# EAGLE board numpad (EAGLE 9.6.2)
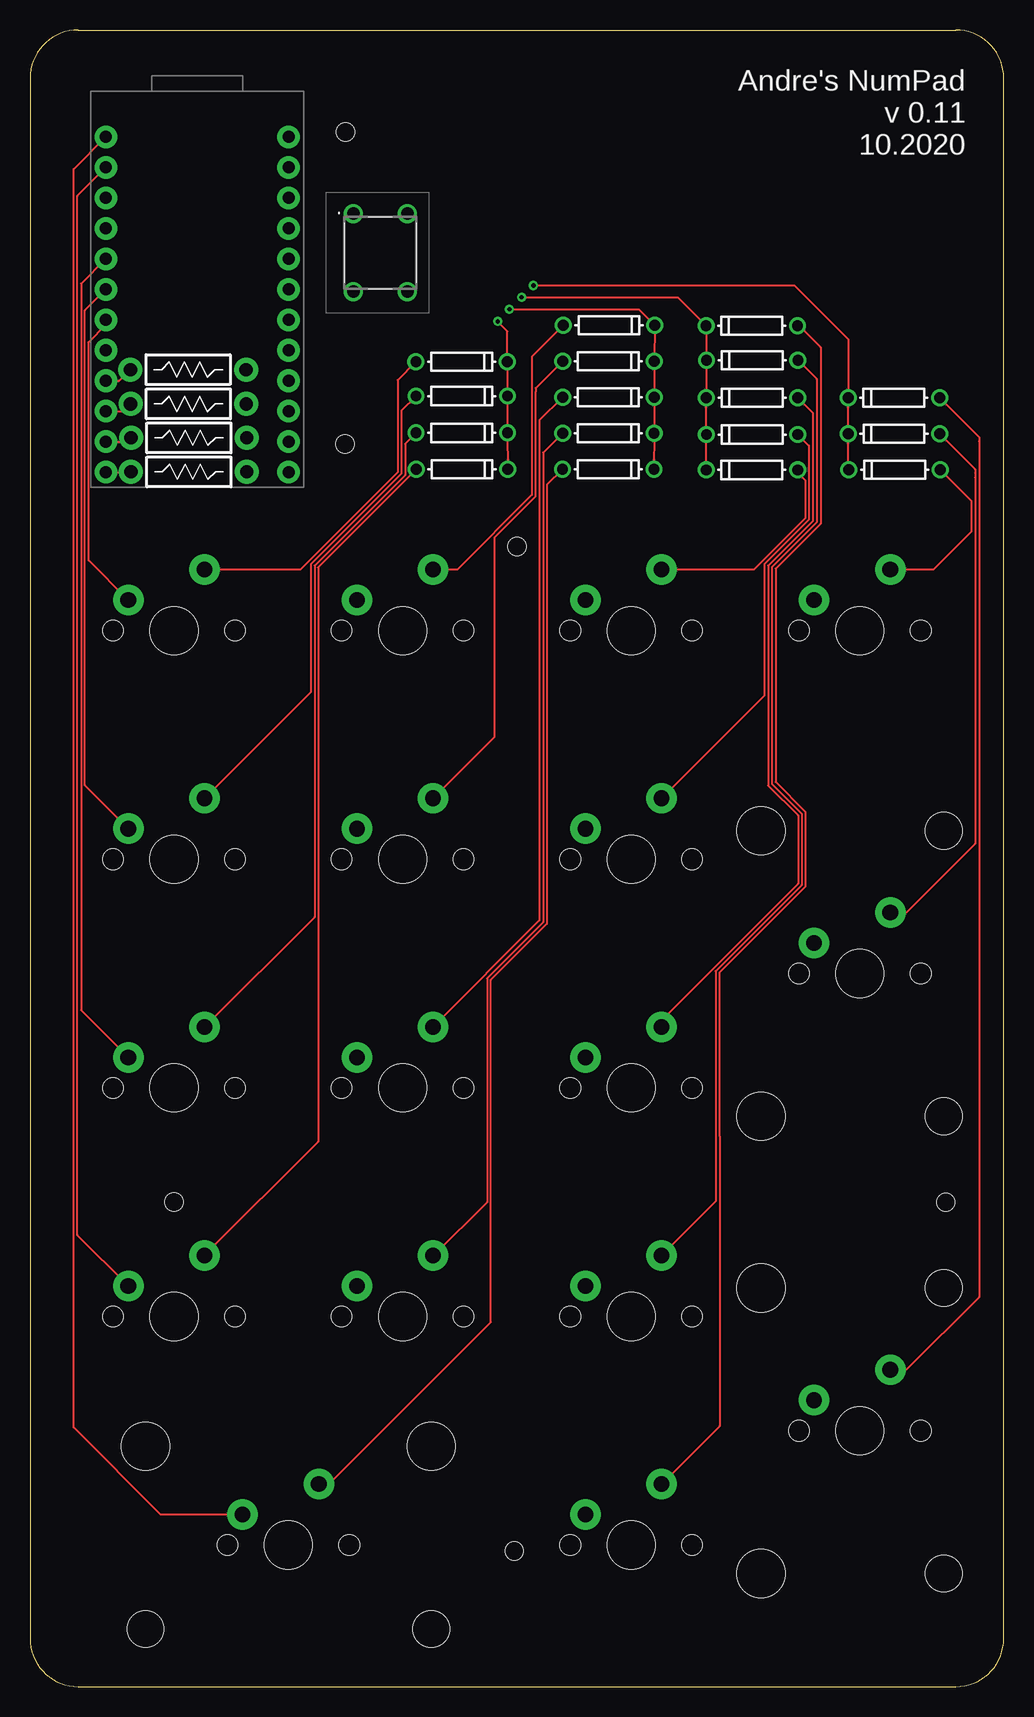
[diagram p0: board, top side]
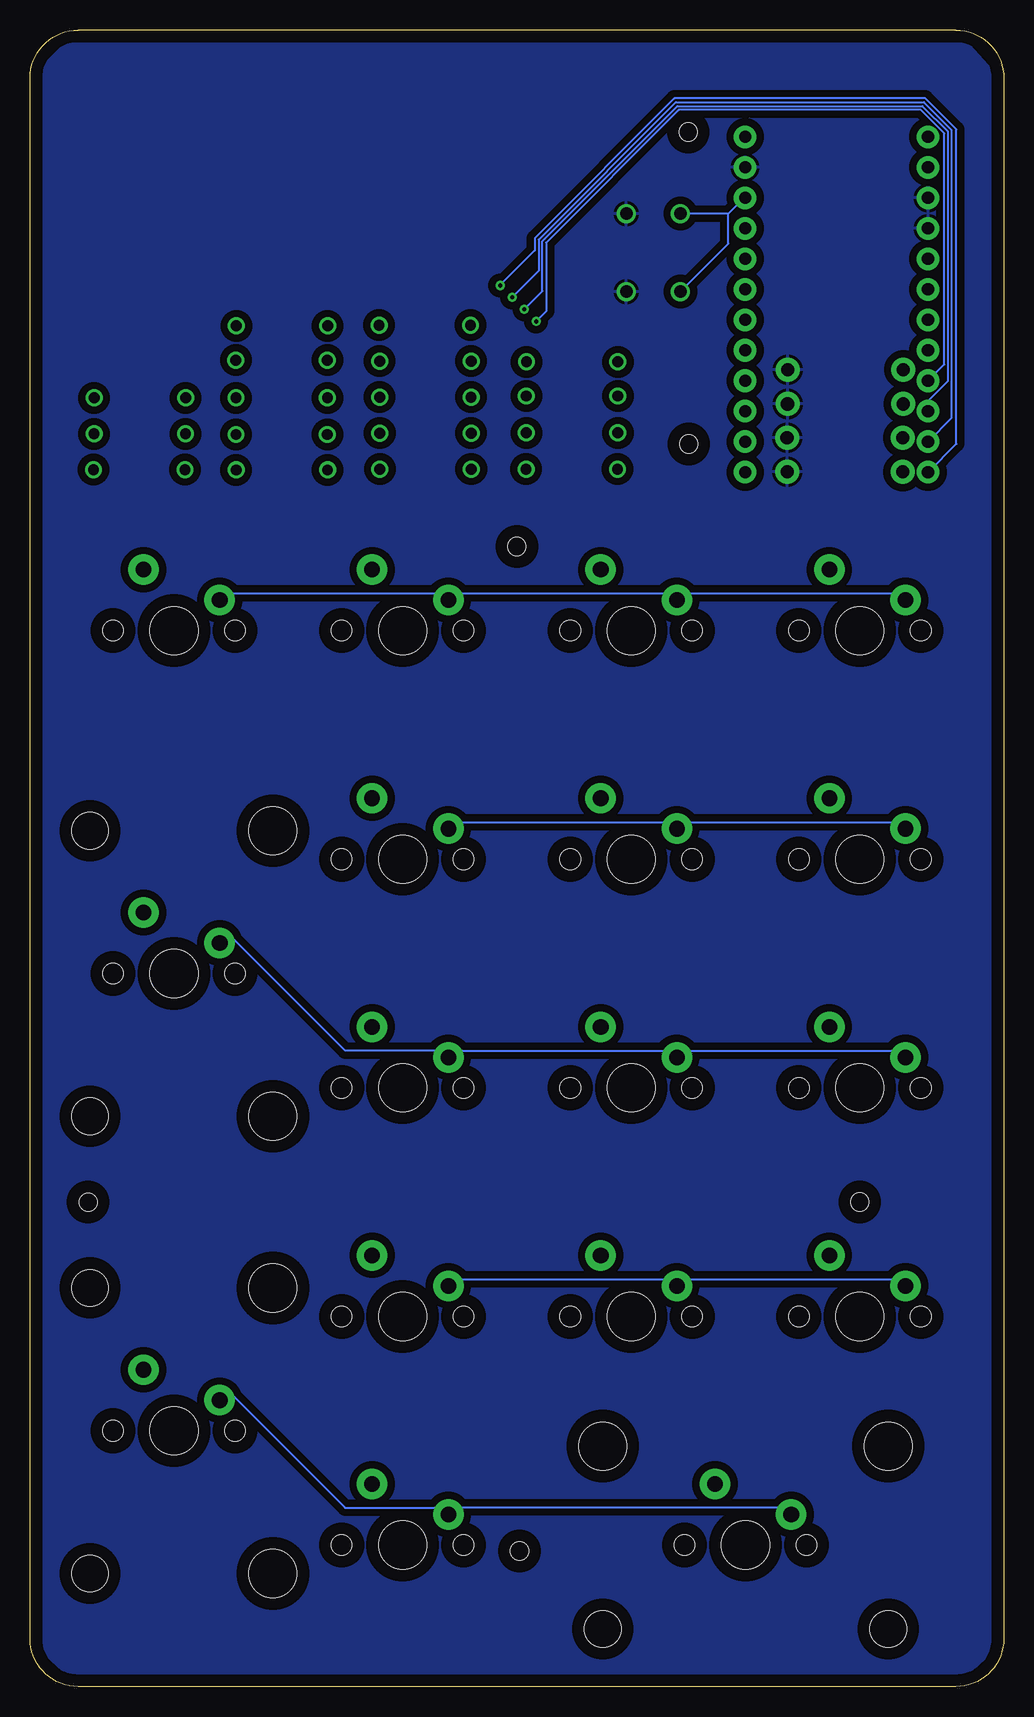
[diagram p1: board, bottom side, seen from below]

Size 81.15 x 138.05 mm. Coordinates in mm from the lower left corner, seen from the top.
Outline: 0,134.05 0,4 arc90 4,0 77.15,0 arc90 81.15,4 81.15,134.05 arc90 77.15,138.05 4,138.05 arc90 0,134.05
Copper layers (1*16): Top 0.035mm / dielectric 1.5mm / Bottom 0.035mm
Design rules "default": minimum track width 6mil, minimum drill 0.35mm, track to track 6mil, track to pad 6mil, pad to pad 6mil, via to via 6mil, smd to smd 6mil, copper to edge 40mil, drill to drill 6mil, minimum pad ring 10mil, minimum via ring 8mil, stop-mask expansion 4mil, vias tented up to drill 0mil, thermal gap 10mil
Holes 1.5 mm at 40.58,95.01 26.25,103.55 26.29,129.56 76.3,40.38 12,40.38 40.36,11.3

## Footprints (pad centres in the part's own frame; a part is rotated, then mirrored left to right if it is on the bottom)
MX-2U-FLIPPED = drill 1.3 pad 2.54: MX1 -3.81,2.54; MX2 2.54,5.08 | hole 4: 0,0; -11.9,8.24; 11.9,8.24 | hole 1.7: -5.08,0; 5.08,0 | hole 3.05: -11.9,-7; 11.9,-7
MX-1U = drill 1.3 pad 2.54: MX1 -3.81,2.54; MX2 2.54,5.08 | hole 4: 0,0 | hole 1.7: -5.08,0; 5.08,0
SPARKFUN_PRO_MICRO = drill 1.016 pad 1.88: 1 -7.62,12.7; 2 -7.62,10.16; 3 -7.62,7.62; 4 -7.62,5.08; 5 -7.62,2.54; 6 -7.62,0; 7 -7.62,-2.54; 8 -7.62,-5.08; 9 -7.62,-7.62; 10 -7.62,-10.16; 11 -7.62,-12.7; 12 -7.62,-15.24; 13 7.62,-15.24; 14 7.62,-12.7; 15 7.62,-10.16; 16 7.62,-7.62; 17 7.62,-5.08; 18 7.62,-2.54; 19 7.62,0; 20 7.62,2.54; 21 7.62,5.08; 22 7.62,7.62; 23 7.62,10.16; 24 7.62,12.7
DO-1N4148 = drill 0.9: A -3.81,0; C 3.81,0
MX-2U-ROTATED = drill 1.3 pad 2.54: MX1 -3.81,2.54; MX2 2.54,5.08 | hole 4: 0,0; -8.24,-11.9; -8.24,11.9 | hole 1.7: -5.08,0; 5.08,0 | hole 3.05: 7,-11.9; 7,11.9
THT-RESISTOR = drill 1.1 pad 2: 1 -4.82,0; 2 4.82,0
TL1105AF160Q = drill 1.05 pad 1.575: 1 0,0; 2 0,-6.5; 3 4.5,0; 4 4.5,-6.5

## Placement (x,y rotation side)
0  KEYSWITCH-PLAIN-MX-2U-FLIPPED  [MX-2U-FLIPPED]  21.52,11.8 0 top
1  KEYSWITCH-PLAIN-MX-1U  [MX-1U]  12,30.85 0 top
2  KEYSWITCH-PLAIN-MX-1U  [MX-1U]  31.05,30.85 0 top
3  KEYSWITCH-PLAIN-MX-1U  [MX-1U]  50.1,30.85 0 top
4  KEYSWITCH-PLAIN-MX-1U  [MX-1U]  12,49.9 0 top
5  KEYSWITCH-PLAIN-MX-1U  [MX-1U]  31.05,49.9 0 top
6  KEYSWITCH-PLAIN-MX-1U  [MX-1U]  50.1,49.9 0 top
7  KEYSWITCH-PLAIN-MX-1U  [MX-1U]  12,68.95 0 top
8  KEYSWITCH-PLAIN-MX-1U  [MX-1U]  31.05,68.95 0 top
9  KEYSWITCH-PLAIN-MX-1U  [MX-1U]  50.1,68.95 0 top
B1  SPARKFUN_PRO_MICRO  [SPARKFUN_PRO_MICRO]  13.94,116.45 0 top
D2  [DO-1N4148]  35.98,107.55 0 top
D3  [DO-1N4148]  35.98,104.48 0 top
D4  [DO-1N4148]  36,101.45 0 top
D5  [DO-1N4148]  48.19,104.45 0 top
D6  [DO-1N4148]  48.19,101.45 0 top
D7  [DO-1N4148]  48.21,107.45 0 top
D8  [DO-1N4148]  48.2,110.45 0 top
D9  [DO-1N4148]  48.25,113.45 0 top
D10  [DO-1N4148]  60.16,101.39 180 top
D11  [DO-1N4148]  72.05,101.41 180 top
D12  [DO-1N4148]  72,104.4 180 top
D13  [DO-1N4148]  71.99,107.4 180 top
D14  [DO-1N4148]  60.18,110.53 180 top
D15  [DO-1N4148]  60.15,113.4 180 top
D16  [DO-1N4148]  60.18,104.34 180 top
D17  [DO-1N4148]  60.17,107.4 180 top
D18  [DO-1N4148]  35.97,110.4 0 top
ENTER  KEYSWITCH-PLAIN-MX-2U-ROTATED  [MX-2U-ROTATED]  69.15,21.33 0 top
MINUS  KEYSWITCH-PLAIN-MX-1U  [MX-1U]  69.15,88 0 top
NUM  KEYSWITCH-PLAIN-MX-1U  [MX-1U]  12,88 0 top
PERIOD  KEYSWITCH-PLAIN-MX-1U  [MX-1U]  50.1,11.8 0 top
PLUS  KEYSWITCH-PLAIN-MX-2U-ROTATED  [MX-2U-ROTATED]  69.15,59.43 0 top
R1  20k  [THT-RESISTOR]  13.19,109.75 0 top
R2  20k  [THT-RESISTOR]  13.24,101.23 0 top
R3  20k  [THT-RESISTOR]  13.24,104.07 0 top
R4  20k  [THT-RESISTOR]  13.2,106.89 0 top
S1  TL1105AF160Q  [TL1105AF160Q]  26.95,122.75 0 top
SLASH  KEYSWITCH-PLAIN-MX-1U  [MX-1U]  31.05,88 0 top
TIMES  KEYSWITCH-PLAIN-MX-1U  [MX-1U]  50.1,88 0 top

## Library data of the parts
0 1-9 ENTER MINUS NUM PERIOD PLUS SLASH TIMES = Keyboard
B1 = SparkFun-Boards
D2-D18 = adafruit
R1-R4 = Components
S1 = SamacSys_Parts; DESCRIPTION: E-SWITCH - TL1105AF160Q - SWITCH, TACTILE SPST, 50mA, THROUGH HOLE; HEIGHT: 6.8mm; MANUFACTURER_NAME: E-Switch; MANUFACTURER_PART_NUMBER: TL1105AF160Q; MOUSER_PART_NUMBER: 612-TL1105A; MOUSER_PRICE-STOCK: https://www.mouser.co.uk/ProductDetail/E-Switch/TL1105AF160Q?qs=YXf4ACKMM4wdc4witUH7eQ%3D%3D

## Nets
GND: B1.3 B1.4 B1.23 R1.2 R2.2 R3.2 R4.2 S1.3 S1.4
N$1: 7.MX2 D2.A
N$2: 4.MX2 D3.A
N$3: 1.MX2 D4.A
N$4: 2.MX2 D5.A
N$5: 0.MX2 D6.A
N$6: 5.MX2 D7.A
N$7: 8.MX2 D8.A
N$8: D9.A SLASH.MX2
N$9: D10.A TIMES.MX2
N$10: D11.A MINUS.MX2
N$11: D12.A PLUS.MX2
N$12: D13.A ENTER.MX2
N$13: 3.MX2 D14.A
N$14: D15.A PERIOD.MX2
N$15: 9.MX2 D16.A
N$16: B1.9 D2.C D3.C D4.C D18.C R1.1
N$17: 6.MX2 D17.A
N$18: D18.A NUM.MX2
N$19: 0.MX1 B1.1 ENTER.MX1 PERIOD.MX1
N$20: 1.MX1 2.MX1 3.MX1 B1.2
N$21: 4.MX1 5.MX1 6.MX1 B1.5 PLUS.MX1
N$22: 7.MX1 8.MX1 9.MX1 B1.6
N$23: B1.7 MINUS.MX1 NUM.MX1 SLASH.MX1 TIMES.MX1
N$24: B1.22 S1.1 S1.2
N$25: B1.10 D5.C D6.C D7.C D8.C D9.C R4.1
N$26: B1.11 D10.C D14.C D15.C D16.C D17.C R3.1
N$27: B1.12 D11.C D12.C D13.C R2.1
RAW: B1.24
VCC: B1.21

## Tracks (layer width: path | path; a pad name or v marks a point on that pad's centre or on a via)
GND
  pour Bottom (isolate 0.61): 0.95,134.75 3.94,138.05 77.23,138.04 81.15,134.01 81.16,3.94 77.17,0 4.09,0.01 0.03,3.71 0,133.81
N$1
  Top 0.152: 7.MX2 14.56,74.03 23.4,82.88 23.4,93.54 30.94,101.08 30.94,105.75 30.94,106.17 30.94,106.33 D2.A
N$2
  Top 0.152: 4.MX2 14.57,54.98 23.71,64.13 23.71,93.41 31.26,100.96 31.26,103.57 D3.A
N$3
  Top 0.152: 1.MX2 24.02,45.41 24.02,93.28 D4.A
N$4
  Top 0.152: 2.MX2 33.63,35.93 38.09,40.39 38.09,59.03 42.76,63.7 42.76,102.83 D5.A
N$5
  Top 0.152: 0.MX2 24.91,16.88 38.41,30.38 38.41,58.9 43.07,63.56 43.07,99.75 43.07,99.92 43.07,100.14 D6.A
N$6
  Top 0.152: 5.MX2 42.46,63.86 42.46,105.51 D7.A
N$7
  Top 0.152: 8.MX2 38.72,79.17 38.72,95.77 42.14,99.19 42.14,107.75 42.14,107.9 42.14,108.21 D8.A
N$8
  Top 0.152: SLASH.MX2 35.61,93.08 41.83,99.31 41.83,110.84 D9.A
N$9
  Top 0.152: TIMES.MX2 60.32,93.08 64.6,97.36 64.6,100.54 63.97,101.17 D10.A
N$10
  Top 0.152: MINUS.MX2 75.28,93.08 78.44,96.25 78.44,98.82 D11.A
N$11
  Top 0.152: PLUS.MX2 73.03,64.51 78.77,70.24 78.77,100.75 78.77,101.15 78.77,101.45 D12.A
N$12
  Top 0.152: ENTER.MX2 73.03,26.41 79.08,32.46 79.08,103.75 79.08,103.81 79.08,104.12 D13.A
N$13
  Top 0.152: 3.MX2 57.14,40.43 57.14,59.62 64.31,66.79 64.31,72.76 61.82,75.25 61.82,93.29 65.55,97.02 65.55,108.99 64,110.53 D14.A
N$14
  Top 0.152: PERIOD.MX2 57.47,21.71 57.47,45.87 57.45,45.89 57.45,59.5 64.62,66.66 64.62,72.9 62.13,75.39 62.13,93.16 65.88,96.92 65.88,111.62 64.09,113.4 D15.A
N$15
  Top 0.152: 9.MX2 61.2,82.59 61.2,93.53 64.91,97.24 64.91,103.42 D16.A
N$16  (via drill 0.35)
  Top 0.152: B1.9 7.44,108.83 R1.1 | 38.97,113.73 38.97,113.75 | 38.97,113.75 v38.97,113.77 | D4.C D3.C D2.C D18.C 39.78,112.95 38.97,113.75
  Bottom 0.152: B1.9 4.95,110.19 4.95,129.44 6.91,131.4 27.07,131.4 38.14,120.33 38.14,114.6 v38.97,113.77
N$17
  Top 0.152: D17.A 65.23,106.15 65.23,97.13 61.52,93.42 61.52,75.09 64,72.61 64,66.91 52.64,55.55 6.MX2
N$18
  Top 0.152: NUM.MX2 22.52,93.08 30.63,101.2 30.63,108.87 D18.A
N$19
  Top 0.152: 0.MX1 10.89,14.34 3.63,21.6 3.63,126.46 B1.1
  Bottom 0.152: 0.MX1 18.3,14.93 45.7,14.93 PERIOD.MX1 46.84,14.9 54.89,14.9 64.6,24.61 ENTER.MX1
N$20
  Top 0.152: B1.2 3.95,124.23 3.95,37.63 1.MX1
  Bottom 0.152: 1.MX1 8.75,33.96 26.68,33.96 2.MX1 27.79,33.95 45.74,33.95 3.MX1
N$21
  Top 0.152: 4.MX1 4.26,56.38 4.26,116.93 B1.5
  Bottom 0.152: 4.MX1 8.74,53 26.69,53 5.MX1 27.39,52.44 27.94,53 45.74,53 6.MX1 46.75,52.44 47.3,53 54.87,53 64.83,62.96 65.34,62.44 PLUS.MX1
N$22
  Top 0.152: 7.MX1 4.57,75.12 4.57,114.69 B1.6
  Bottom 0.152: 7.MX1 8.74,72.05 26.69,72.05 8.MX1 27.83,72.08 28.21,72.08 28.17,72.05 45.74,72.05 9.MX1
N$23
  Top 0.152: B1.7 6.32,113.47 4.88,112.03 4.88,93.86 NUM.MX1
  Bottom 0.152: NUM.MX1 8.76,91.11 26.67,91.11 SLASH.MX1 27.81,91.11 45.72,91.11 TIMES.MX1 46.84,91.1 64.79,91.1 MINUS.MX1
N$24
  Bottom 0.152: B1.22 21.64,124.07 22.95,122.75 | 22.95,122.75 S1.1 | S1.2 22.95,120.25 22.95,122.75
N$25  (via drill 0.35)
  Top 0.152: B1.10 7.78,106.29 R4.1 | D6.C D5.C D7.C D8.C D9.C 50.73,114.78 v39.95,114.78
  Bottom 0.152: B1.10 6.32,107.17 4.65,108.84 4.65,129.58 6.78,131.71 27.2,131.71 38.45,120.46 38.45,116.28 v39.95,114.78
N$26  (via drill 0.35)
  Top 0.152: B1.11 8.09,103.75 R3.1 | D10.C D16.C D17.C D14.C D15.C 53.96,115.78 v40.97,115.78
  Bottom 0.152: B1.11 4.34,105.72 4.34,129.71 6.66,132.03 27.33,132.03 38.77,120.59 38.77,117.98 v40.97,115.78
N$27  (via drill 0.35)
  Top 0.152: B1.12 8.39,101.21 R2.1 | 41.98,116.74 v41.95,116.76 63.7,116.76 68.17,112.29 68.18,107.75 | D13.C | 68.18,107.75 D13.C | D11.C 68.19,101.46 D12.C 68.19,107.75 68.18,107.75
  Bottom 0.152: B1.12 3.95,103.57 3.95,129.76 6.54,132.36 27.44,132.36 39.08,120.72 39.08,119.68 41.95,116.81 v41.95,116.76

## Text on the board
tSilk: Andre's NumPad / v 0.11 / 10.2020